# Altium PCB PCB puissant.PcbDoc
Units mil, origin at the board's own origin, x right, y up, seen from the top; angles counter-clockwise.
Board outline 3937.01 x 2755.91 mil, 4 copper layers (Top Layer, Internal Plane 1, Internal Plane 2, Bottom Layer); 15 components, 15 nets, 63 pads, 0 vias.
Unrouted connection lines stored in the file: 29.
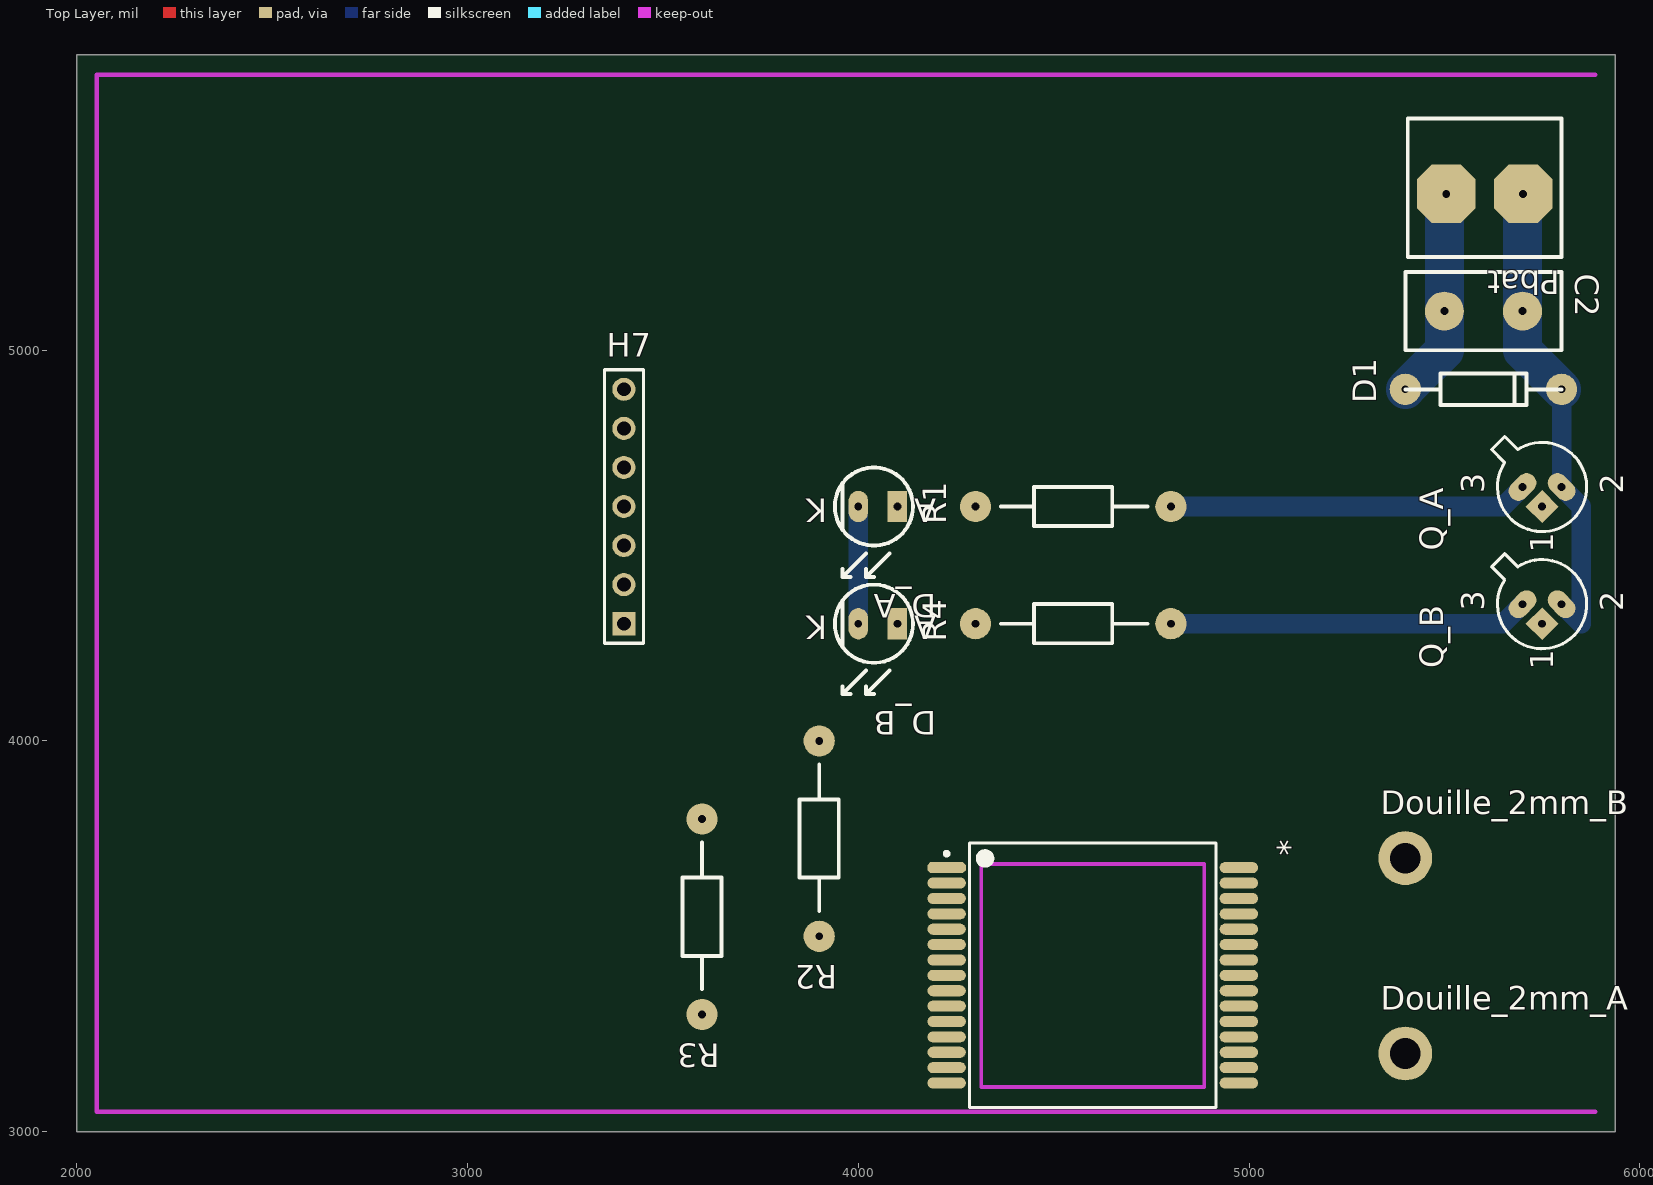
[diagram p0: Top Layer view]
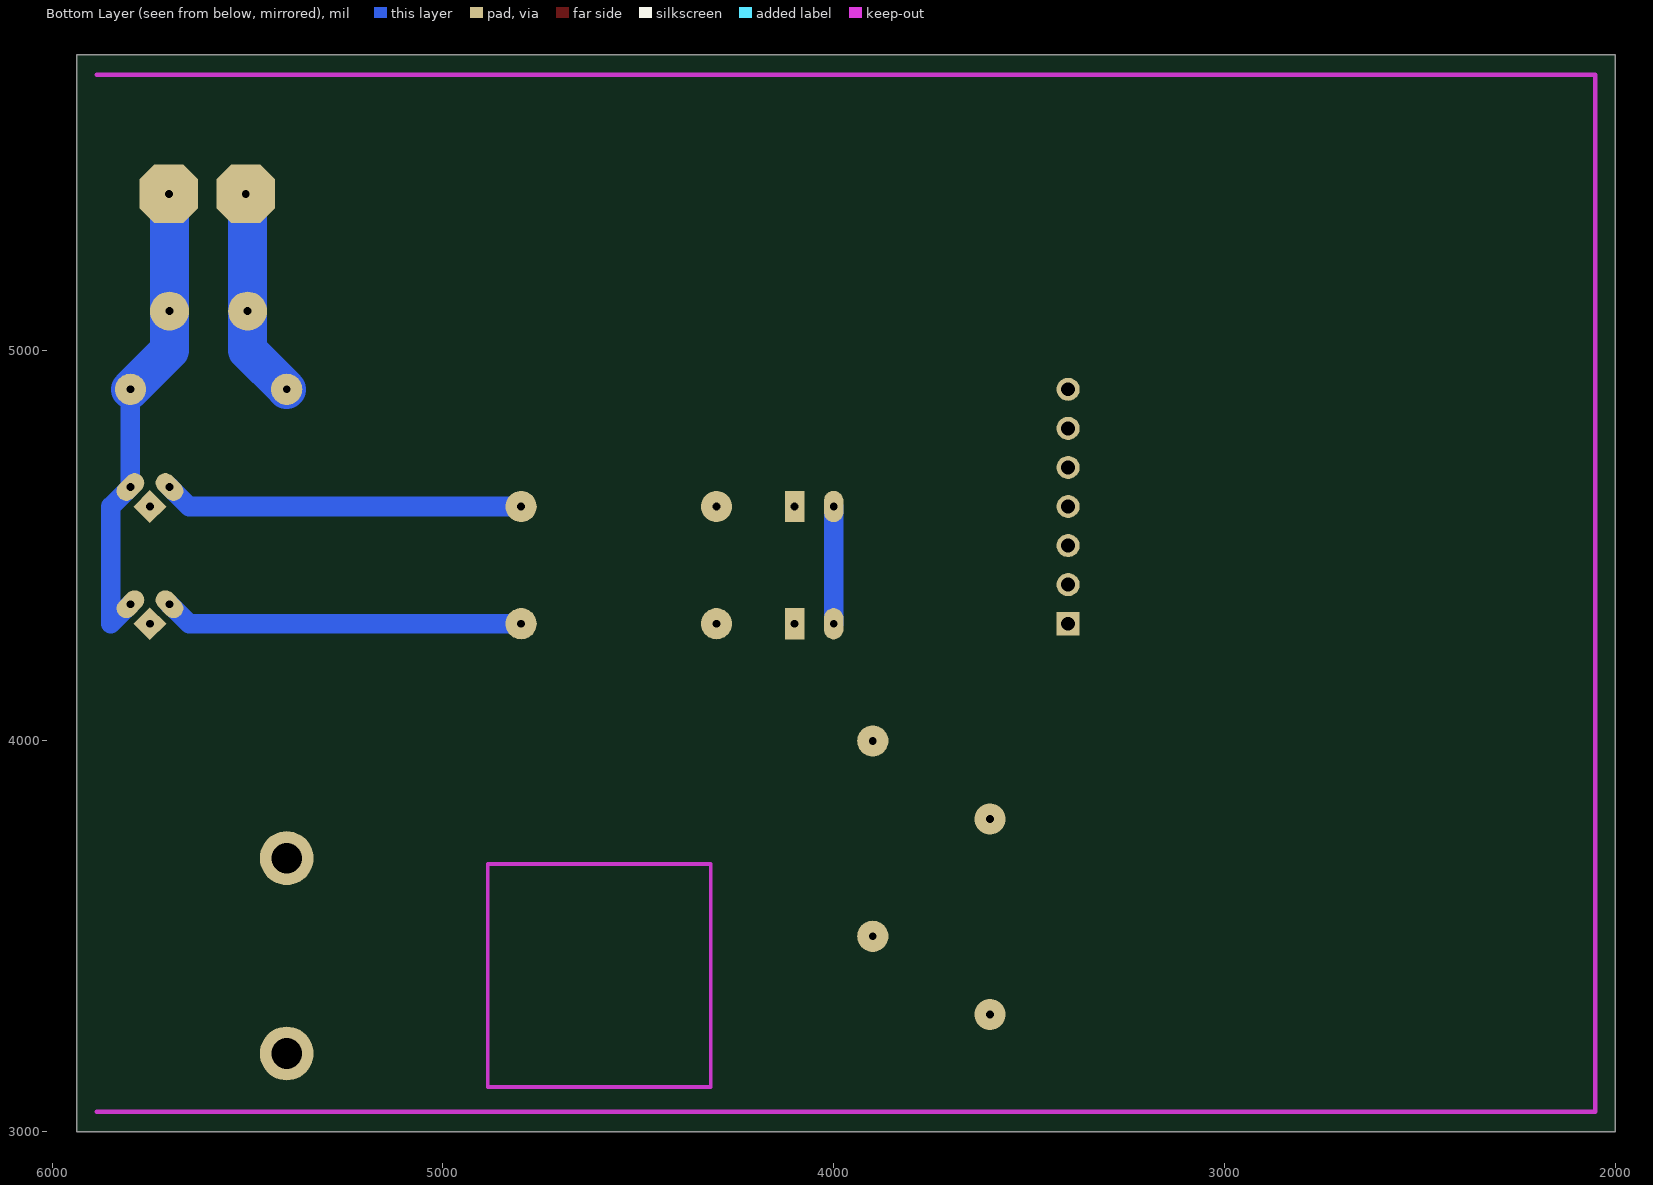
[diagram p1: Bottom Layer view, seen from below]
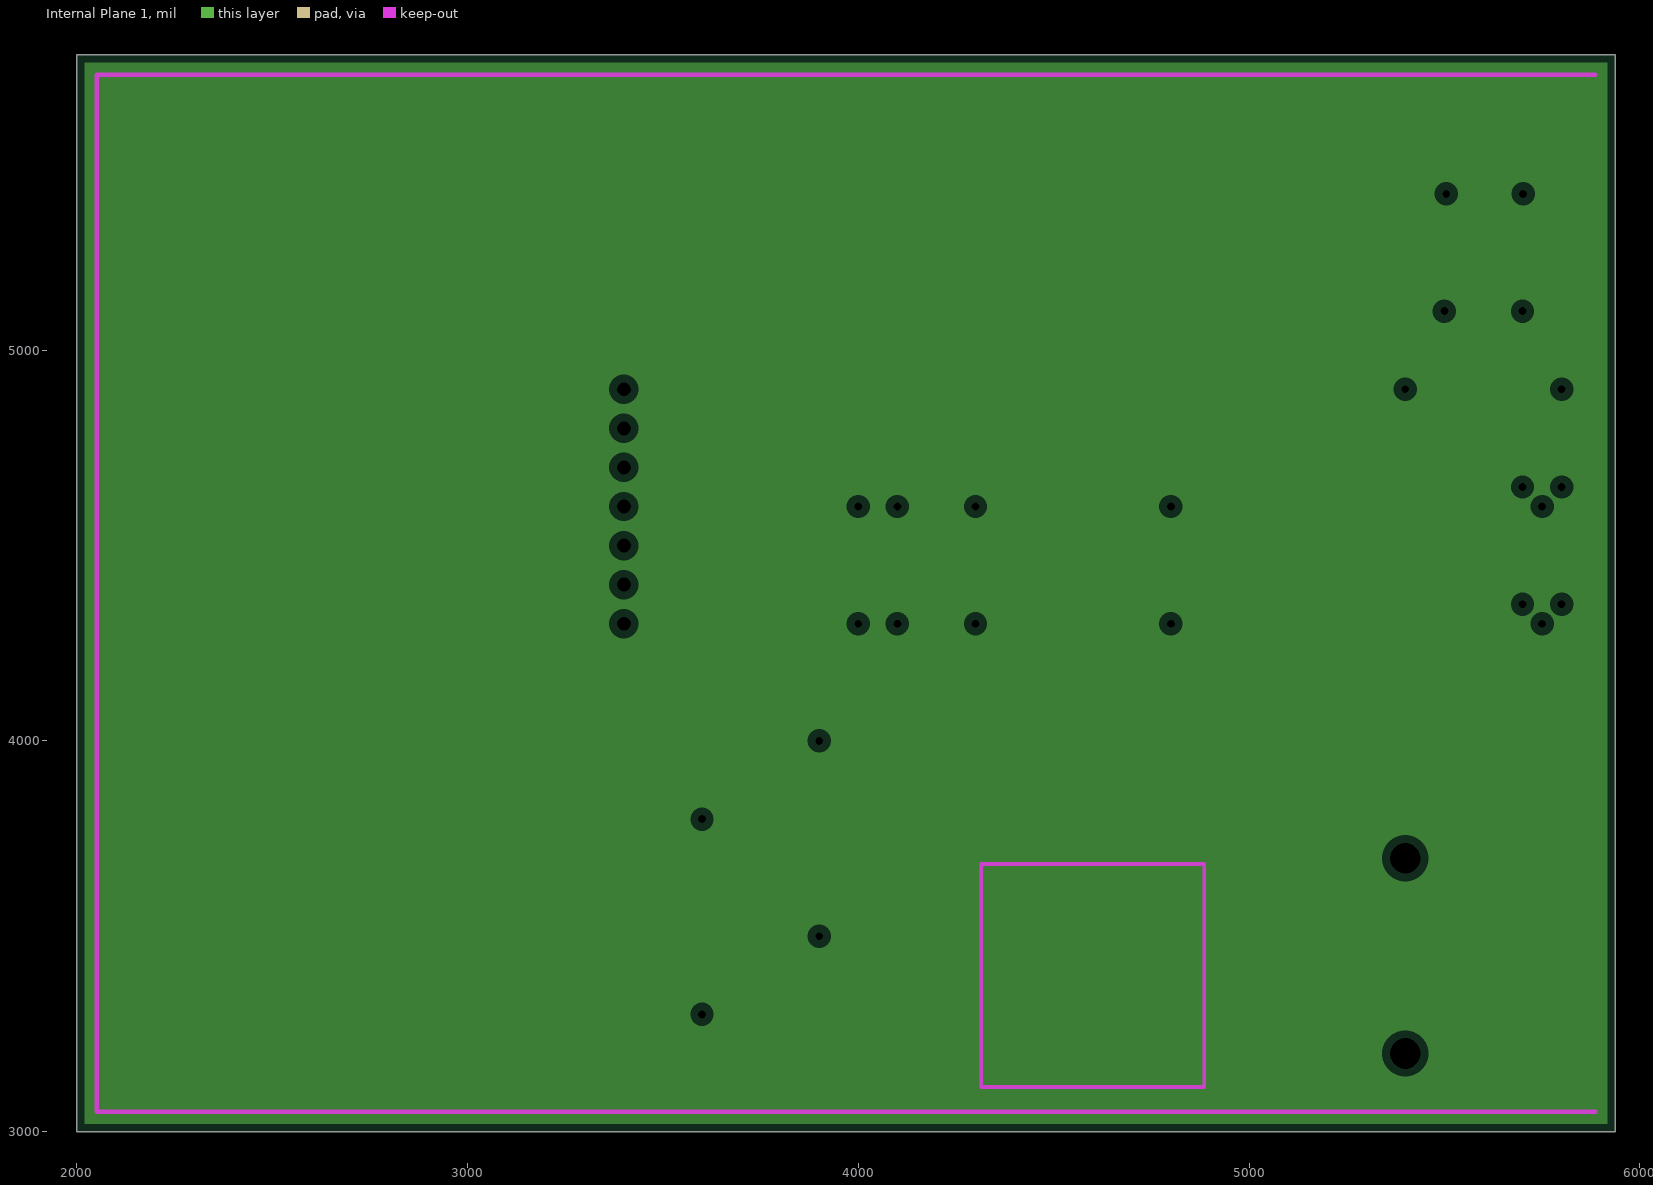
[diagram p2: Internal Plane 1, clearances drawn from the general rule]
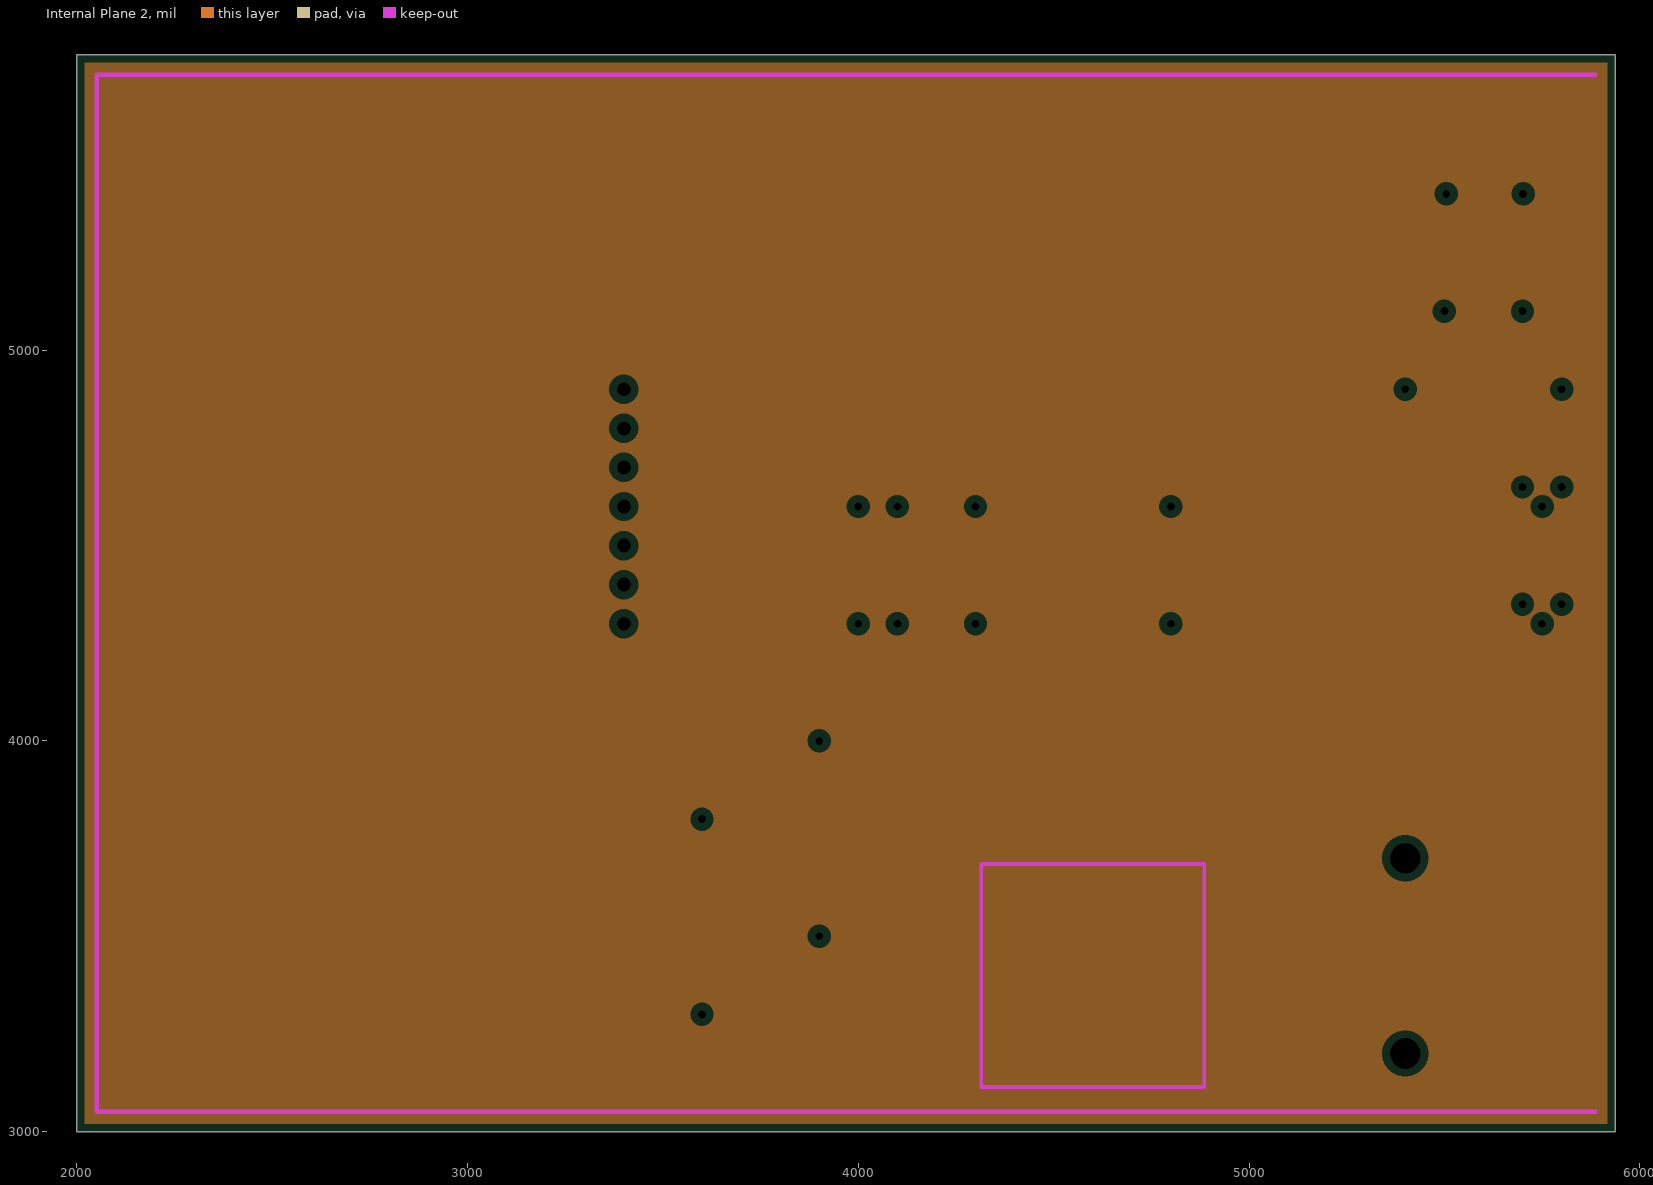
[diagram p3: Internal Plane 2, clearances drawn from the general rule]

## Layer stack, top to bottom
Top Layer: signal copper 1.4
Dielectric: dielectric 12.6, FR-4, Dk 4.8
Internal Plane 1: plane copper 1.4
Dielectric: dielectric 12.6, FR-4, Dk 4.8
Internal Plane 2: plane copper 1.4
Dielectric: dielectric 12.6, FR-4, Dk 4.8
Bottom Layer: signal copper 1.4

## Board outline
2000,3000 5937.01,3000 5937.01,5755.91 2000,5755.91

## Design rules (kind name [scope] priority, off if disabled: settings)
Clearance [All] p1: gap=11
FabricationTestPointUsage TestPointUsage [All] p1: valid=0 allowmultiple=FALSE
FabricationTestpoint Testpoint [All] p1: side=3 testpointundercomponent=TRUE minsize=40 maxsize=100 preferedsize=60 minholesize=0 maxholesize=40 preferedholesize=32 testpointgrid=1 allowsidetop=TRUE allowsidebottom=TRUE usegrid=TRUE gridtolerance=0.01
PlaneClearance [All] p1: clearance=20
PlaneConnect [All] p1: planeconnectstyle=Relief reliefexpansion=20 reliefentries=4 reliefconductorwidth=10 reliefairgap=10
PolygonConnect [All] p1: connectstyle=Relief reliefconductorwidth=10 reliefentries=4 polygonreliefangle="90 Angle"
RoomDefinition schema [InComponentClass('schema')] p1: confinementstyle=ConfineIn formatcopy=TRUE lockcomponents=FALSE outline 0,0 2000,0 2000,1000 0,1000
RoutingLayers [All] p1: top layer_v5=FALSE bottom layer_v5=TRUE
RoutingVias [All] p1: holewidth=20 width=70 viastyle="Through Hole" minholewidth=28 minwidth=50 maxholewidth=28 maxwidth=50
SilkscreenOverComponentPads [All] p1: minsilkscreentomaskgap=10
SolderMaskExpansion [All] p1: expansion=4
Width [All] p1: maxlimit=120 minlimit=10 preferedwidth=20
22 further rules are at their usual default settings.

## Components (designator, comment, footprint, x,y, rotation, side; value= is the part's Value field where it differs from the comment)
* "Component_1" MultiPowerSO-30 4600,3400 r0 top
C2 "Cap2" CAPA2 5500,5100 r0 top
D1 "Diode 1N4148" Ddiode 5800,4900 r180 top
D_A "Led" LED 4100,4600 r180 top
D_B "Led" LED 4100,4300 r180 top
Douille_2mm_A "douille_2mm" Douille-2mm 5400,3200 r90 top
Douille_2mm_B "douille_2mm" Douille-2mm 5400,3700 r90 top
H7 "Header 7" HDR1X7 3400,4300 r90 top
Pbat "Batterie" Bornier_2 5800,5400 r180 top
Q_A "2N2222A" TO-18 5750,4650 r90 top
Q_B "2N2222A" TO-18 5750,4350 r90 top
R1 "Res2" res5_1/4W 4800,4600 r180 top
R2 "Res2" res5_1/4W 3900,4000 r270 top
R3 "Res2" res5_1/4W 3600,3800 r270 top
R4 "Res2" res5_1/4W 4800,4300 r180 top

## Footprints (in the part's own frame and the unit in brackets; to place one, negate y for a bottom-side part, rotate by r counter-clockwise, add the part's x,y. Pads: shape width x height; smd on the part's side, far side on the other; paste and mask are expansions set on the pad)
Bornier_2 [mil]
  oct 150x150 hole 20: 1(98.43,0) 2(295.28,0)
  silkscreen extent 0,-193 394,161
CAPA2 [mil]
  round 100 hole 20: 1(0,0) 2(200,0)
  silkscreen extent -100,-100 300,100
Ddiode [mil]
  round 80 hole 20: A(400,0) K(0,0)
  silkscreen extent 0,-40 400,40
Douille-2mm [mm]
  round 3.5 hole 2: 1(0,0)
HDR1X7 [mm] "Connector; Header; 7 Position"
  rect 1.5x1.5 hole 0.9: 1(0,0)
  round 1.5 hole 0.9: 2(2.54,0) 3(5.08,0) 4(7.62,0) 5(10.16,0) 6(12.7,0) 7(15.24,0)
  silkscreen extent -1.27,-1.27 16.51,1.27
LED [mil]
  rect 50x80 hole 20: 1(0,0)
  oval 50x80 hole 20: 2(100,0)
  silkscreen extent -40,-100 160,180
MultiPowerSO-30 [mm] "MultiPowerSO-30, 30-Leads, Body 17.2x15.0mm (max), Pitch 1.00mm, IPC Medium Density"
  oct 2.5x0.72 smd: 1(-9.5,7)
  oval 2.5x0.72 smd: 2(-9.5,6) 3(-9.5,5) 4(-9.5,4) 5(-9.5,3) 6(-9.5,2) 7(-9.5,1) 8(-9.5,0) 9(-9.5,-1) 10(-9.5,-2) 11(-9.5,-3) 12(-9.5,-4) 13(-9.5,-5) 14(-9.5,-6) 15(-9.5,-7) 16(9.5,-7) 17(9.5,-6) 18(9.5,-5) 19(9.5,-4) 20(9.5,-3) 21(9.5,-2) 22(9.5,-1) 23(9.5,0) 24(9.5,1) 25(9.5,2) 26(9.5,3) 27(9.5,4) 28(9.5,5) 29(9.5,6) 30(9.5,7)
  Keep-Out Layer lines w0.254: -7.25,-7.25 7.25,-7.25 7.25,7.25 -7.25,7.25 -7.25,-7.25
  silkscreen extent -9.62,-8.6 8,8.6, body extent -8,-8.6 8,8.6, height 2.35
res5_1/4W [mil]
  round 80 hole 20: 1(0,0) 2(500,0)
  silkscreen extent 60,-50 435,50
TO-18 [mil] "Can; 3 Leads; Pin Circle Dia. 2.54 mm; Lead Dia. 0.49 mm (max)"
  rect 60x60 hole 20 rot 45: 1(-50,0)
  oval 50x80 hole 20 rot 135: 2(0,-50)
  oval 50x80 hole 20 rot 45: 3(0,50)
  silkscreen extent -114,-114 129,129

## Part data
C2: "Capacitor"
D1: "High Conductance Fast Diode"
D_A D_B: "LED"
Douille_2mm_A Douille_2mm_B: "1-Pin"
H7: "Header, 7-Pin"
Pbat: library part Bornier_2, "Header, 2-Pin"
Q_A Q_B: "High Speed Switches"
R1 R2 R3 R4: "Resistor"

## Nets (pads, with @x,y where several pads share a name; then routed paths per layer and width w, separated by ;. In a path a pad name is that pad's centre, name@x,y a point inside that pad or via, vN(x,y) a via of type N, cw(c..) or ccw(c..) an arc to the next point about the centre after c; other vN are vias at no path point)
EN: *.8 H7.3
GND: *.18 *.19 *.20 *.26 *.27 *.28 C2.1 D1.A D_A.2 D_B.2 H7.2 Pbat.2 | length 843.4
  Bottom Layer w50: D_B.2 D_A.2 ; Pbat.2@5500,5395.28 Pbat.2
  Bottom Layer w100: D1.A 5500,5000 C2.1 Pbat.2@5500,5395.28
IN1: *.5 H7.6
IN2: *.11 H7.5
Net*_1: *.1 *.16 *.21 Douille_2mm_A.1
Net*_6: *.6 Q_A.1 R2.2
Net*_10: *.10 Q_B.1 R3.2
Net*_15: *.15 *.25 *.30 Douille_2mm_B.1
NetD_A_1: D_A.1 R1.2
NetD_B_1: D_B.1 R4.2
NetQ_A_3: Q_A.3 R1.1 | length 920.7
  Bottom Layer w50: R1.1 5650,4600 Q_A.3
NetQ_B_3: Q_B.3 R4.1 | length 920.7
  Bottom Layer w50: R4.1 5650,4300 Q_B.3
SENSE: H7.7
V_5V_FPT: H7.4
V_BATT: *.3 *.13 *.23 C2.2 D1.K H7.1 Pbat.1 Q_A.2 Q_B.2 R2.1 R3.1 | length 1233.5
  Bottom Layer w50: Q_B.2 5850,4300 5850,4600 Q_A.2 D1.K
  Bottom Layer w100: Pbat.1 5700,5398.43 C2.2 5700,5000 D1.K
pads on no net: *.2 *.4 *.7 *.9 *.12 *.14 *.17 *.22 *.24 *.29

## Polygon pours and split planes (outlines as drawn)
no net on Internal Plane 1 (split plane): 5916.91,3020.1 2020.1,3020.1 2020.1,5735.81 5916.91,5735.81
no net on Internal Plane 2 (split plane): 5916.91,3020.1 2020.1,3020.1 2020.1,5735.81 5916.91,5735.81

## Keep-outs
Keep-Out Layer:
  lines w11.81: 5885.83,3051.18 2051.18,3051.18 2051.18,5704.72 5885.83,5704.72

## Dimensions
2051.18,3051.18 to 5885.83,3051.18 on Mechanical 1
2051.18,3051.18 to 2051.18,5704.72 on Mechanical 1

## Text inside footprints (layer, text, board x,y; h text height)
*: Keep-Out Layer "CUT" at 4521.26,3380.32 h60
D_A: Top Overlay "A" at 4200,4620 h60 r180; Top Overlay "K" at 3920,4620 h60 r180
D_B: Top Overlay "A" at 4200,4320 h60 r180; Top Overlay "K" at 3920,4320 h60 r180
Q_A: Top Overlay "3" at 5601.5,4633.5 h59.05 r90; Top Overlay "2" at 5958.31,4632.56 h59.05 r90; Top Overlay "1" at 5778.27,4482.2 h59.05 r90
Q_B: Top Overlay "3" at 5601.5,4333.5 h59.05 r90; Top Overlay "2" at 5958.31,4332.56 h59.05 r90; Top Overlay "1" at 5778.27,4182.2 h59.05 r90